# Altium PCB Placa_Final_Embebidos.PcbDoc
Units mm, origin at the board's own origin, x right, y up, seen from the top; angles counter-clockwise.
Board outline 200 x 100 mm, 2 copper layers (Top Layer, Bottom Layer); 77 components, 78 nets, 447 pads, 0 vias.
Unrouted connection lines stored in the file: 1.
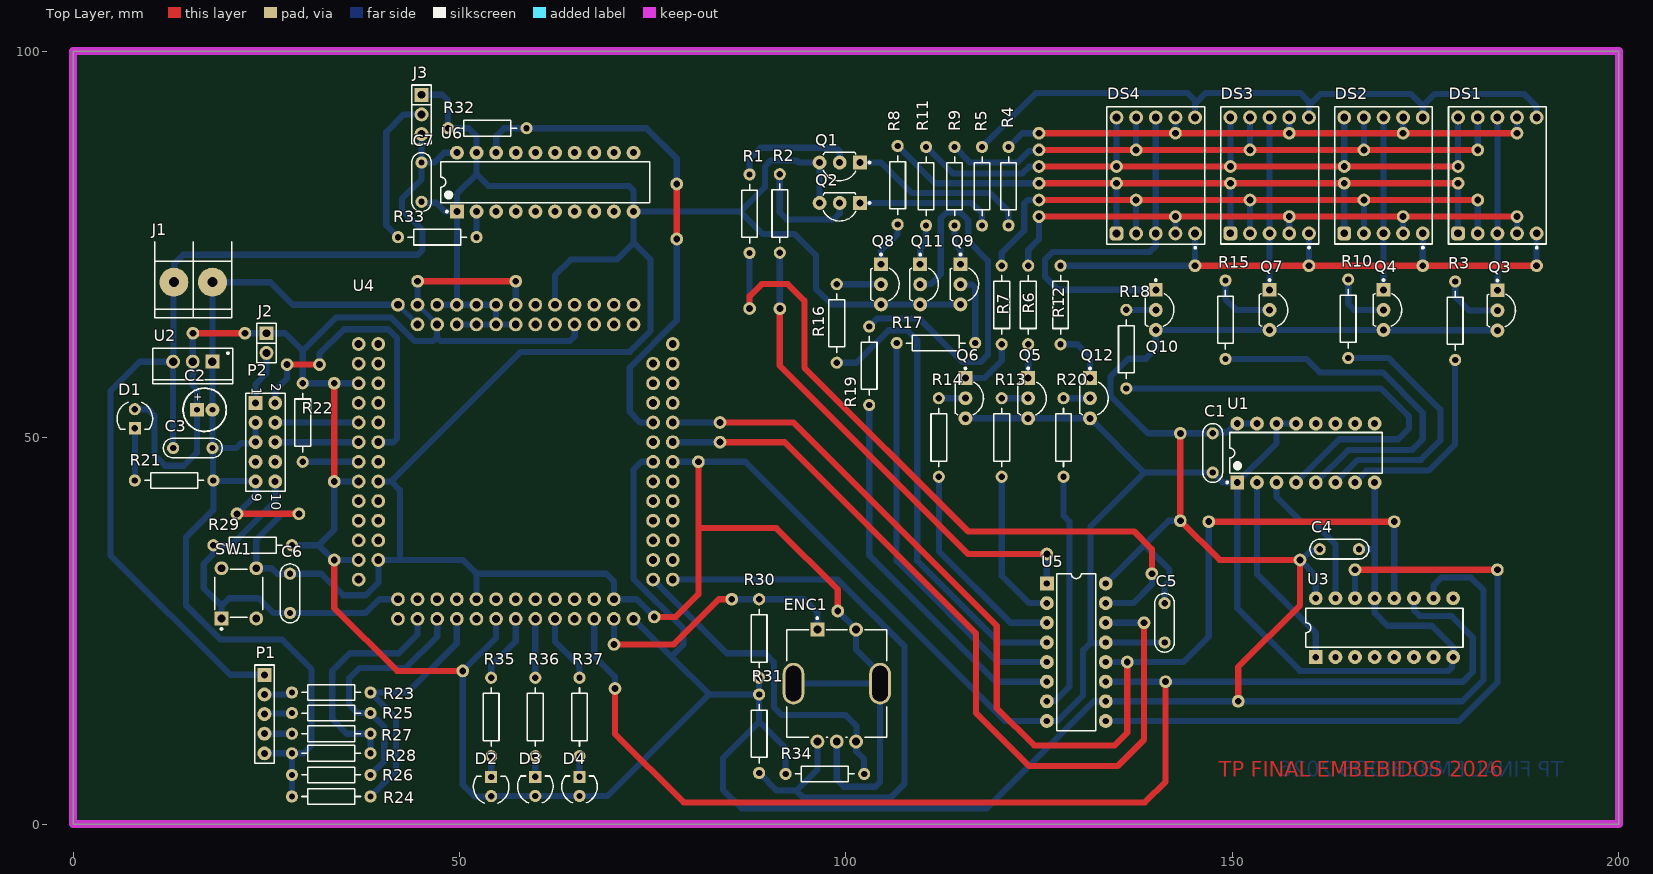
[diagram p0: Top Layer view]
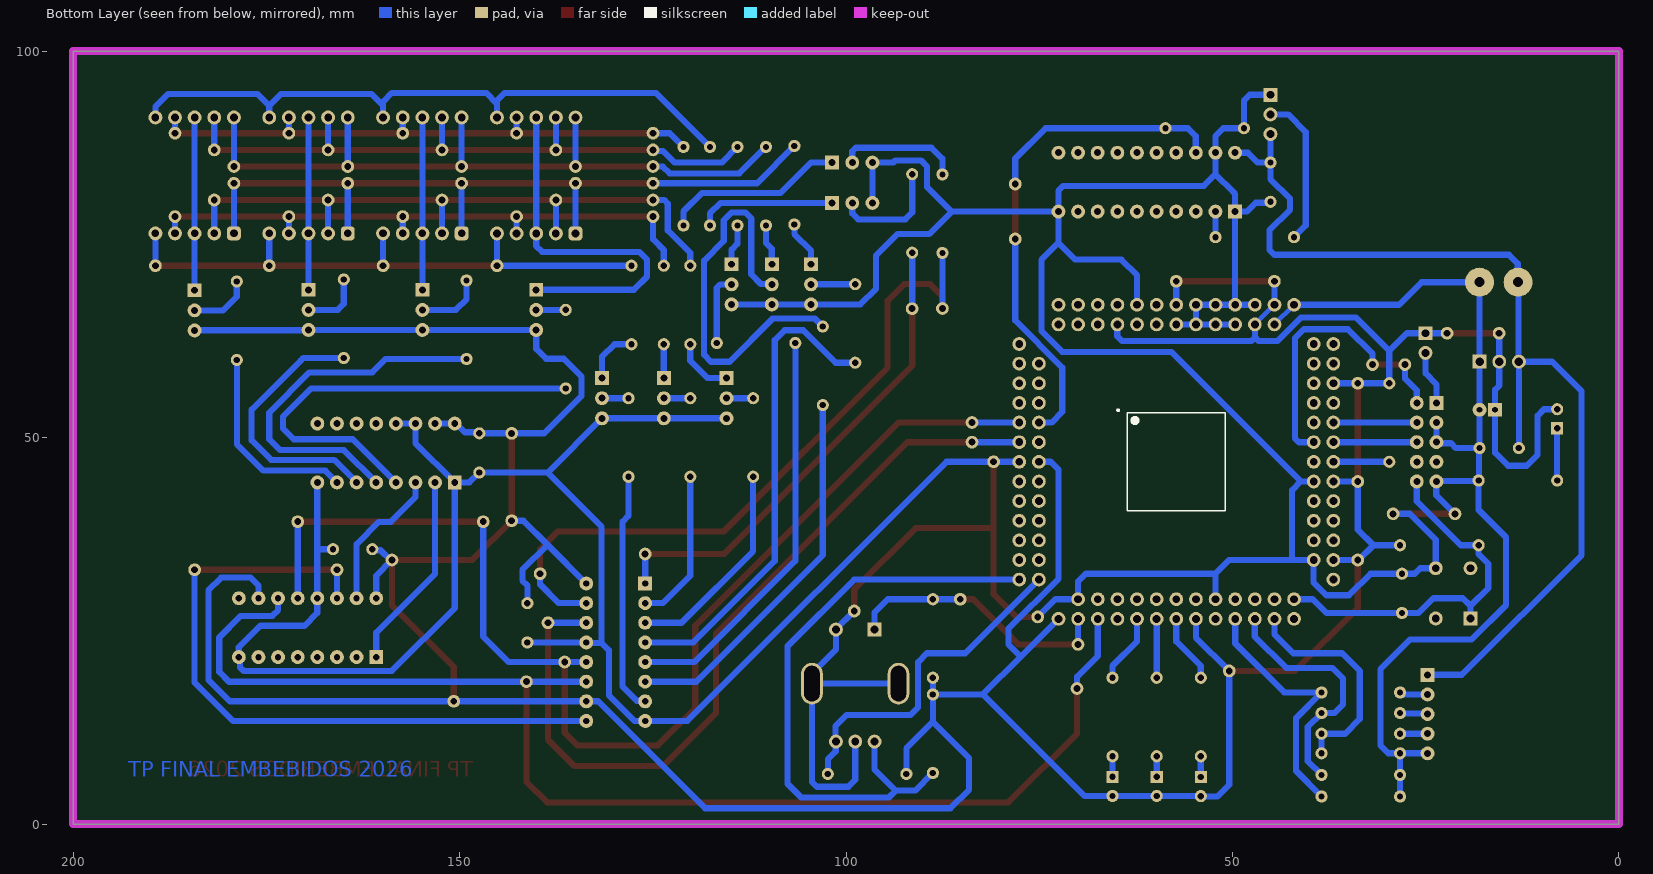
[diagram p1: Bottom Layer view, seen from below]
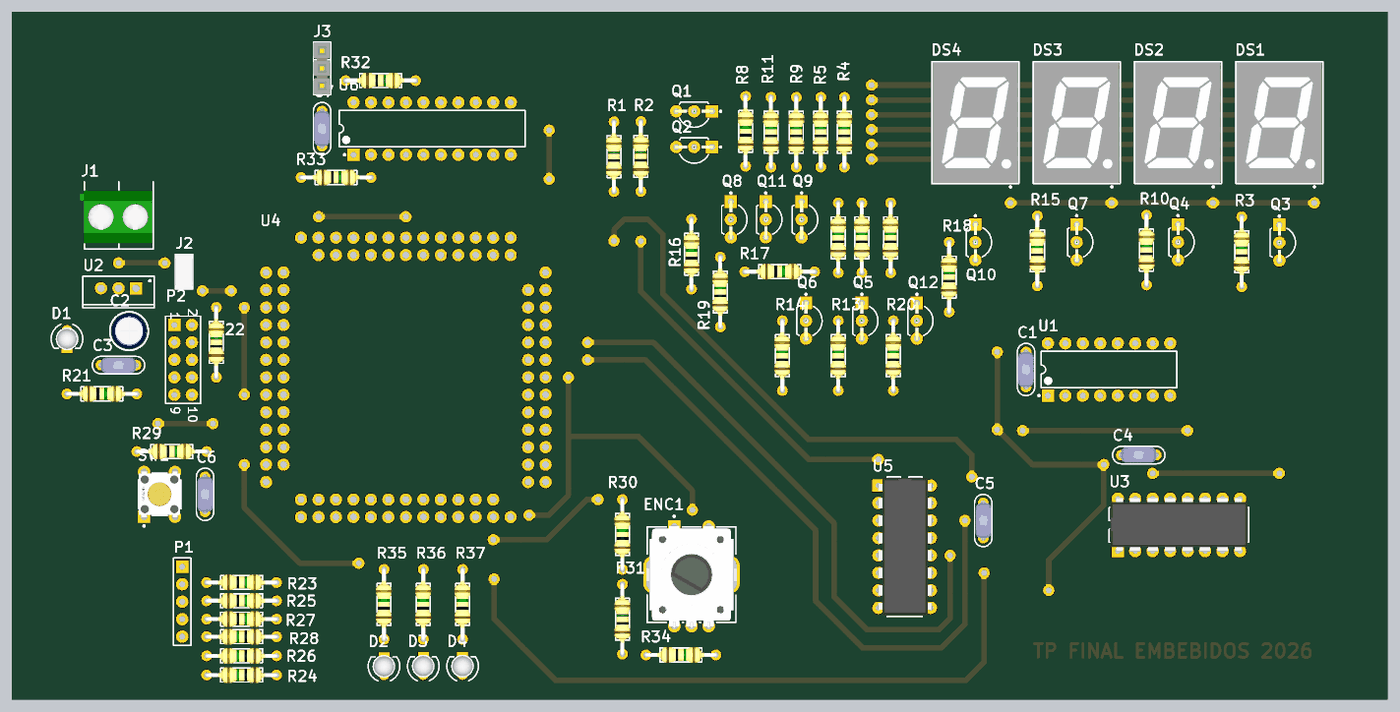
[diagram p2: 3D render of the assembled board from above, using the file's embedded part models]

## Layer stack, top to bottom
Top Solder: solder mask 0.0102, Solder Resist, Dk 3.5
Top Layer: signal copper 0.0356
Dielectric 1: dielectric 0.32, FR-4, Dk 4.8
Bottom Layer: signal copper 0.0356
Bottom Solder: solder mask 0.0102, Solder Resist, Dk 3.5

## Board outline
0,0 0,100 200,100 200,0

## Design rules (kind name [scope] priority, off if disabled: settings)
Clearance [All] p1: gap=0.2 ignorepadtopadclearanceinfootprint=FALSE
PolygonConnect [All] p1: connectstyle=Relief reliefconductorwidth=0.254 reliefentries=4 polygonreliefangle="90 Angle" airgapwidth=0.254
RoutingVias [All] p1: holewidth=0.711 width=1.27 viastyle="Through Hole" minholewidth=0.711 minwidth=1.27 maxholewidth=0.711 maxwidth=1.27
SolderMaskExpansion [All] p1: expansion=0.102 istentingtop=FALSE
SupplyNets "Schematic Supply Nets_2" [InNet('5V')] p1: voltage=0.000
SupplyNets "Schematic Supply Nets_1" [InNet('3V3')] p2: voltage=0.000
SupplyNets "Schematic Supply Nets" [InNet('GND')] p3: voltage=0.000
Width [All] p1: maxlimit=1 minlimit=0.6 preferedwidth=0.8
30 further rules are at their usual default settings.

## Classes and differential pairs
component class Placa_Final_Embebidos_MCU: C2 C3 C5 C6 C7 D4 ENC1 J1 J2 P2 R22 R25 R26 R28 R29 R31 R32 R33 R35 SW1 U2 U3 U4 U6
component class Placa_Final_Embebidos_Displays: C1 DS2 DS4 Q1 Q2 Q3 Q4 Q5 Q6 Q7 Q8 Q9 Q10 Q11 Q12 R1 R2 R3 R4 R5 R6 R7 R8 R9 R10 R12 R13 R14 R15 R16 R17 R18 R19 R20 U4

## Components (designator, comment, footprint, x,y, rotation, side; value= is the part's Value field where it differs from the comment)
C1 "100nF" CAP200 147.447,48.006 r270 top
C2 "10uF" CAP100RP 17.021,53.594 r0 top
C3 "100nF" CAP200 15.481,48.641 r0 top
C4 "100nF" CAP200 163.83,35.56 r180 top
C5 "100nF" CAP200 141.224,26.035 r90 top
C6 "100nF" CAP200 28.067,29.845 r90 top
C7 "100nF" CAP200 45.085,83.045 r270 top
D1 "" LED3 7.988,52.451 r270 top
D2 "" LED3 54.089,4.826 r90 top
D3 "" LED3 59.804,4.851 r90 top
D4 "" LED3 65.519,4.851 r90 top
DS1 "" WL-T7DS_L17.5W12.4H7 184.277,83.92 r0 top
DS2 "" WL-T7DS_L17.5W12.4H7 169.545,83.92 r0 top
DS3 "" WL-T7DS_L17.5W12.4H7 154.813,83.92 r0 top
DS4 "" WL-T7DS_L17.5W12.4H7 140.081,83.913 r0 top
ENC1 "PEC12R-3217F-S0024" FP-PEC12R-3217F-S0024-MFG 98.805,18.161 r0 top
J1 "POWER" BORNERA2 15.534,70.104 r90 top
J2 "3V3 REF" JUMPER2 25.019,62.23 r270 top
J3 "MATRIZ" SIP3 45.085,91.808 r270 top
P1 "CARD" HDR1X5 24.752,19.304 r270 top
P2 "JTAG PROG" HDR2X5 23.609,54.483 r270 top
Q1 "BC337" ONSC-TO-92-3-29-11_AM_BL 99.187,85.571 r180 top
Q2 "BC337" ONSC-TO-92-3-29-11_AM_BL 99.187,80.364 r180 top
Q3 "BC327" ONSC-TO-92-3-29-11_AM_BL 184.277,66.461 r270 top
Q4 "BC327" ONSC-TO-92-3-29-11_AM_BL 169.545,66.521 r270 top
Q5 "BC337" ONSC-TO-92-3-29-11_AM_BL 123.571,55.091 r270 top
Q6 "BC337" ONSC-TO-92-3-29-11_AM_BL 115.443,55.091 r270 top
Q7 "BC327" ONSC-TO-92-3-29-11_AM_BL 154.813,66.521 r270 top
Q8 "BC337" ONSC-TO-92-3-29-11_AM_BL 104.521,69.823 r270 top
Q9 "BC337" ONSC-TO-92-3-29-11_AM_BL 114.808,69.823 r270 top
Q10 "BC327" ONSC-TO-92-3-29-11_AM_BL 140.081,66.521 r270 top
Q11 "BC337" ONSC-TO-92-3-29-11_AM_BL 109.601,69.823 r270 top
Q12 "BC337" ONSC-TO-92-3-29-11_AM_BL 131.572,55.091 r270 top
R1 "4.7K" RES400 87.528,73.887 r90 top
R2 "4.7K" RES400 91.44,73.914 r90 top
R3 "4.7K" RES400 178.816,60.044 r90 top
R4 "68" RES400 121.031,77.443 r90 top
R5 "68" RES400 117.602,77.443 r90 top
R6 "68" RES400 123.571,62.076 r90 top
R7 "68" RES400 120.142,62.076 r90 top
R8 "68" RES400 106.68,77.57 r90 top
R9 "68" RES400 114.046,77.443 r90 top
R10 "4.7K" RES400 164.973,60.298 r90 top
R11 "68" RES400 110.363,77.443 r90 top
R12 "68" RES400 127.762,62.076 r90 top
R13 "4.7K" RES400 120.142,44.931 r90 top
R14 "4.7K" RES400 112.014,44.931 r90 top
R15 "4.7K" RES400 149.098,60.171 r90 top
R16 "4.7K" RES400 98.806,59.69 r90 top
R17 "4.7K" RES400 106.553,62.23 r0 top
R18 "4.7K" RES400 136.271,56.361 r90 top
R19 "4.7K" RES400 102.997,54.202 r90 top
R20 "4.7K" RES400 128.143,44.931 r90 top
R21 "330" RES400 7.988,44.45 r0 top
R22 "10k" RES400 29.705,46.863 r90 top
R23 "1.8K" RES400 28.308,17.018 r0 top
R24 "3.3K" RES400 38.468,3.556 r180 top
R25 "1.8K" RES400 28.308,14.351 r0 top
R26 "3.3K" RES400 38.468,6.35 r180 top
R27 "1.8K" RES400 28.308,11.684 r0 top
R28 "3.3K" RES400 38.468,9.144 r180 top
R29 "10k" RES400 18.148,36.068 r0 top
R30 "10k" RES400 88.76,18.923 r90 top
R31 "10k" RES400 88.76,6.604 r90 top
R32 "4.7K" RES400 48.514,90.03 r0 top
R33 "470" RES400 42.037,75.933 r0 top
R34 "10k" RES400 92.189,6.477 r0 top
R35 "330" RES400 54.089,8.763 r90 top
R36 "330" RES400 59.804,8.763 r90 top
R37 "330" RES400 65.519,8.763 r90 top
SW1 "" FP-B3F-1055-MFG 21.45,29.845 r90 top
U1 "SN74HC139N" N0016A 159.512,48.006 r90 top
U2 "LD1117V33" TO220 15.481,59.817 r180 top
U3 "74HC595" DIP16 160.782,21.59 r90 top
U4 "MK64FN1M0VLL12" K64F_DevBoard_Headers_MIRROR 57.264,46.863 r0 top
U5 "74HC595" DIP16 125.984,31.115 r0 top
U6 "CD74HCT245E" N0020A 61.087,83.045 r90 top

## Footprints (in the part's own frame and the unit in brackets; to place one, negate y for a bottom-side part, rotate by r counter-clockwise, add the part's x,y. Pads: shape width x height; smd on the part's side, far side on the other; paste and mask are expansions set on the pad)
BORNERA2 [mm] "Bornera con Tornillos 5mm separación"
  round 3.75 hole 1.3: 1(0,2.5) 2(0,-2.5)
  silkscreen extent -4.6,-5 5.2,5, body extent -3.76,-4.89 3.94,5.61, height 10
CAP100RP [mm] "Body diameter 5mm"
  rect 1.8x1.8 hole 0.762: 1(-1,0)
  round 1.8 hole 0.762: 2(1,0)
  silkscreen extent -2.79,-2.79 2.79,2.79, body extent -2.53,-2.51 2.53,2.54, height 11.53
CAP200 [mil]
  round 62 hole 32: 1(-100,0) 2(100,0)
  silkscreen extent -150,-50 150,50, body extent -110,-46 110,44, height 246
DIP16 [mm]
  rect 1.8x1.8 hole 0.813: 1(0,0)
  round 1.8 hole 0.813: 2(0,-2.54) 3(0,-5.08) 4(0,-7.62) 5(0,-10.16) 6(0,-12.7) 7(0,-15.24) 8(0,-17.78) 9(7.62,-17.78) 10(7.62,-15.24) 11(7.62,-12.7) 12(7.62,-10.16) 13(7.62,-7.62) 14(7.62,-5.08) 15(7.62,-2.54) 16(7.62,0)
  silkscreen extent 1.27,-19.05 6.35,1.27, body extent -0.08,-18.89 7.79,1.11, height 1.98
FP-B3F-1055-MFG [mm]
  rect 1.8x1.8 hole 1 paste-2539.97 mask+0: 1(-3.25,2.25)
  round 1.8 hole 1 paste-2539.97 mask+0: 2(3.25,2.25) 3(-3.25,-2.25) 4(3.25,-2.25)
  silkscreen extent -4.72,-3.1 3.1,3.1, body extent -4.13,-3.2 4.13,3.2, height 0.25
FP-PEC12R-3217F-S0024-MFG [mm]
  rect 1.8x1.8 hole 1 paste-2539.97 mask+0: 1(-2.5,7)
  round 1.8 hole 1 paste-2539.97 mask+0: 2(2.5,7) A(-2.5,-7.5) B(2.5,-7.5) C(0,-7.5)
  rrect100% 2.8x5.4 hole 4.6 slot 2 at 0 deg paste-2539.97 mask+0: 3(-5.6,0) 4(5.6,0)
  silkscreen extent -6.45,-6.95 6.45,8.6, body extent -7,-8.37 7,7.88, height 0.25
HDR1X5 [mm] "Connector; Header; 5 Position"
  rect 1.8x1.8 hole 0.9: 1(0,0)
  round 1.8 hole 0.9: 2(2.54,0) 3(5.08,0) 4(7.62,0) 5(10.16,0)
  silkscreen extent -1.27,-1.27 11.43,1.27
HDR2X5 [mm] "Connector; Header; 5x2 Position"
  rect 1.8x1.8 hole 0.9: 1(0,0)
  round 1.8 hole 0.9: 2(0,2.54) 3(2.54,0) 4(2.54,2.54) 5(5.08,0) 6(5.08,2.54) 7(7.62,0) 8(7.62,2.54) 9(10.16,0) 10(10.16,2.54)
  silkscreen extent -1.27,-1.27 11.43,3.81
JUMPER2 [mm]
  rect 1.8x1.8 hole 1.016: 1(-1.27,0)
  round 1.8 hole 1.016: 2(1.27,0)
  silkscreen extent -2.54,-1.27 2.54,1.27, body extent -2.46,-1.27 2.54,1.27, height 9.5
K64F_DevBoard_Headers_MIRROR [mil] "Shrink QFP, 100-Leads, Body 14x14mm, Pitch 0.5mm, IPC High Density"
  round 70 hole 40: 1(600,800) 2(600,700) 3(500,800) 4(500,700) 5(400,800) 6(400,700) 7(300,800) 8(300,700) 9(200,800) 10(200,700) 11(100,800) 12(100,700) 13(0,800) 14(0,700) 15(-100,800) 16(-100,700) 17(-200,800) 18(-200,700) 19(-300,800) 20(-300,700) 21(-400,800) 22(-400,700) 23(-500,800) 24(-500,700) 25(-600,800) 26(-800,600) 27(-700,600) 28(-800,500) 29(-700,500) 30(-800,400) 31(-700,400) 32(-800,300) 33(-700,300) 34(-800,200) 35(-700,200) 36(-800,100) 37(-700,100) 38(-800,0) 39(-700,0) 40(-800,-100) 41(-700,-100) 42(-800,-200) 43(-700,-200) 44(-800,-300) 45(-700,-300) 46(-800,-400) 47(-700,-400) 48(-800,-500) 49(-700,-500) 50(-800,-600) 51(-600,-800) 52(-600,-700) 53(-500,-800) 54(-500,-700) 55(-400,-800) 56(-400,-700) 57(-300,-800) 58(-300,-700) 59(-200,-800) 60(-200,-700) 61(-100,-800) 62(-100,-700) 63(0,-800) 64(0,-700) 65(100,-800) 66(100,-700) 67(200,-800) 68(200,-700) 69(300,-800) 70(300,-700) 71(400,-800) 72(400,-700) 73(500,-800) 74(500,-700) 75(600,-800) 76(800,-600) 77(700,-600) 78(800,-500) 79(700,-500) 80(800,-400) 81(700,-400) 82(800,-300) 83(700,-300) 84(800,-200) 85(700,-200) 86(800,-100) 87(700,-100) 88(800,0) 89(700,0) 90(800,100) 91(700,100) 92(800,200) 93(700,200) 94(800,300) 95(700,300) 96(800,400) 97(700,400) 98(800,500) 99(700,500) 100(800,600)
LED3 [mil]
  round 62 hole 32: 1(-48,0)
  rect 62x62 hole 32: 2(49,0)
  silkscreen extent -84,-90 54,90, body extent -65,-64 65,65, height 19
N0016A [mm] "DIP, 16-Leads, Body 19.7x6.6mm, Pitch 2.54mm"
  rect 1.8x1.8 hole 0.9: 1(-3.81,8.89)
  round 1.8 hole 0.9: 2(-3.81,6.35) 3(-3.81,3.81) 4(-3.81,1.27) 5(-3.81,-1.27) 6(-3.81,-3.81) 7(-3.81,-6.35) 8(-3.81,-8.89) 9(3.81,-8.89) 10(3.81,-6.35) 11(3.81,-3.81) 12(3.81,-1.27) 13(3.81,1.27) 14(3.81,3.81) 15(3.81,6.35) 16(3.81,8.89)
  silkscreen extent -3.93,-9.85 2.65,10.31, body extent -3.95,-9.85 3.95,9.85, height 5.08
N0020A [mm] "DIP, 20-Leads, Body 26.9x6.6mm, Pitch 2.54mm"
  rect 1.8x1.8 hole 0.9: 1(-3.81,11.43)
  round 1.8 hole 0.9: 2(-3.81,8.89) 3(-3.81,6.35) 4(-3.81,3.81) 5(-3.81,1.27) 6(-3.81,-1.27) 7(-3.81,-3.81) 8(-3.81,-6.35) 9(-3.81,-8.89) 10(-3.81,-11.43) 11(3.81,-11.43) 12(3.81,-8.89) 13(3.81,-6.35) 14(3.81,-3.81) 15(3.81,-1.27) 16(3.81,1.27) 17(3.81,3.81) 18(3.81,6.35) 19(3.81,8.89) 20(3.81,11.43)
  silkscreen extent -3.93,-13.5 2.65,13.5, body extent -3.95,-13.45 3.95,13.45, height 5.08
ONSC-TO-92-3-29-11_AM_BL [mm] "TO, 3-Leads, Body Dia 4.7mm, Pitch 2.6mm"
  rect 1.8x1.8 hole 0.9: 1(-2.6,0)
  round 1.8 hole 0.9: 2(0,0) 3(2.6,0)
  silkscreen extent -3.98,-1.34 2.13,2.35, body extent -2.84,-1.34 2.84,2.35, height 5.33
RES400 [mil]
  round 62 hole 32: 1(0,0) 2(400,0)
  silkscreen extent 50,-40 350,40, body extent -12,-45 412,46, height 96
SIP3 [mm]
  rect 1.8x1.8 hole 1.016: 1(-2.54,0)
  round 1.8 hole 1.016: 2(0,0) 3(2.54,0)
  silkscreen extent -3.81,-1.27 3.81,1.27, body extent -3.81,-1.3 3.81,1.24, height 8.38
TO220 [mm] "TO, Thru-Hole, Vertical, Heatsink Mounted; 3 In-Line Leads; Pitch 2.54 mm"
  rect 1.8x1.8 hole 1.1: 1(-2.54,0)
  round 1.8 hole 1.1: 2(0,0) 3(2.54,0)
  silkscreen extent -5.2,-1.75 5.2,2.85, body extent -5.25,-1.8 5.25,2.9, height 19.7
WL-T7DS_L17.5W12.4H7 [mm] "7 Segments Display THT Single Digit , body 12.4x17.5mm"
  rrect50% 1.8x1.8 hole 1: 1(-5.08,-7.5)
  round 1.8 hole 1: 2(-2.54,-7.5) 3(0,-7.5) 4(2.54,-7.5) 5(5.08,-7.5) 6(5.08,7.5) 7(2.54,7.5) 8(0,7.5) 9(-2.54,7.5) 10(-5.08,7.5)
  silkscreen extent -6.32,-9.47 6.32,8.87, body extent -6.2,-8.75 6.2,8.75, height 7.1

## Part data
C1 C3 C4 C5 C6 C7: library part CAP
C2: library part CAPPOL
D1 D2 D3 D4: library part LED
DS1 DS2 DS3 DS4: library part CMP-03913-119893999-3, "7-Seg Display, Comm Anode, Super Red Rohs Compliant: Yes", Forward Current=100mA, Forward Voltage=2V, Max Operating Temperature=85°C, Max Reverse Voltage (DC)=5V, Min Operating Temperature=-40°C, Dominant Wavelength=635nm, Height=7mm, Length=17.5mm, Luminous Intensity=20mcd, RoHS=Compliant, Width=12.4mm
ENC1: library part CMP-07421-000063-1, "ROTARY ENCODER", Height=13.4mm, Length=23mm, RoHS Compliant=Yes, Width=12.5mm
J1: library part "BORNERA 2"
J2: library part JUMPER
J3: library part CON3
P1: library part "Header 5", "Header, 5-Pin", LatestRevisionDate=17-Jul-2002, LatestRevisionNote="Re-released for DXP Platform.", Publisher="Altium Limited"
P2: library part "Header 5X2", "Header, 5-Pin, Dual row", LatestRevisionDate=17-Jul-2002, LatestRevisionNote="Re-released for DXP Platform.", Publisher="Altium Limited"
Q1 Q2 Q5 Q6 Q8 Q9 Q11 Q12: library part CMP-1048-01583-1, "Amplifier Transistor, NPN Silicon, 3-Pin TO-92, Pb-Free, Ammo Box", Manufacturer="On Semiconductor", PartNumber=BC337-40ZL1G, ComponentLink1Description="Manufacturer URL", ComponentLink1URL=http://www.onsemi.com/, ComponentLink2Description=Datasheet, ComponentLink2URL=http://www.onsemi.com/pub_link/Collateral/BC337-D.PDF, ComponentLink3Description="Package Specification", ComponentLink3URL=http://www.onsemi.com/pub_link/Collateral/MAC97-D.PDF, DatasheetVersion="Rev. 8", IC Continuous (A)=0.8, Mounting Technology="Through Hole", PackageDescription="3-Pin Transistor Outline, Body 4.825 x 3.685 mm, Pitch 1.27 mm", PackageReference=TO-92-3-29-11_AM_BL, PackageVersion="Rev. AM", Packing="Ammo Box", Polarity=NPN, RoHS=TRUE
Q3 Q4 Q7 Q10: library part CMP-1048-01577-1, "Amplifier Transistor, PNP Silicon, 3-Pin TO-92, Pb-Free, Ammo Box", Manufacturer="On Semiconductor", PartNumber=BC327-25ZL1G, ComponentLink1Description="Manufacturer URL", ComponentLink1URL=http://www.onsemi.com/, ComponentLink2Description=Datasheet, ComponentLink2URL=http://www.onsemi.com/pub_link/Collateral/BC327-D.PDF, ComponentLink3Description="Package Specification", ComponentLink3URL=http://www.onsemi.com/pub_link/Collateral/MAC97-D.PDF, DatasheetVersion="Rev. 6", IC Continuous (A)=-0.8, Mounting Technology="Through Hole", PackageDescription="3-Pin Transistor Outline, Body 4.825 x 3.685 mm, Pitch 1.27 mm", PackageReference=TO-92-3-29-11_AM_BL, PackageVersion="Rev. AM", Packing="Ammo Box", Polarity=PNP, RoHS=TRUE
R1 R2 R3 R4 R5 R6 R7 R8 R9 R10 R11 R12 R13 R14 R15 R16 R17 R18 R19 R20 R21 R22 R23 R24 R25 R26 R27 R28 R29 R30 R31 R32 R33 R34 R35 R36 R37: library part RES
SW1: library part CMP-08834-000061-1, "SWITCH TACTILE SPST-NO 0.05A 24V", Actuator Color=Orange, Contact Current Rating=50mA, Contact Resistance=100mR, Max Operating Temperature=70°C, Max Voltage Rating (DC)=24V, Min Operating Temperature=-25°C, Operating Force=2.55N, Package Quantity=1500, Actuator Length=3mm, Contact Material=Gold, Contact Plating=Silver, Contact Type="1 maker", Current Rating=50mA, Depth=6mm, Electrical Life=300000Cycles, Height=7.3mm, Illumination Type=Non-Illuminated, Lead Free="Lead Free", Length=6mm, Max Current Rating=50mA, Mechanical Life=100000Cycles, Mount="Through Hole", Number of Poles=1, Orientation=Straight, Packaging=Bag, RoHS Compliant=Yes, Series=B3F, Switch Function=Off-Mom, Switch Travel=0.25mm, Termination="PC Pins", Throw Configuration=SPST, Voltage Rating (DC)=24V, Weight=0.25g, Width=6mm
U1: library part CMP-1633-00660-2, "Dual 2-Line To 4-Line Decoders/Demultiplexers, N0016A, TUBE", F @ Nom Voltage(Max)(Mhz)=28, Generic Part Number=SN74HC139, ICC @ Nom Voltage(Max)(mA)=0.08, Manufacturer="Texas Instruments", Operating Temperature Range(C)="-40 to 85", Rating=Catalog, tpd @ Nom Voltage(Max)(ns)=44, Voltage(Nom)(V)=3.3,5, Bits(#)=4, Channels(#)=2, Code_JEDEC=MS-001, Configuration=2：4, DatasheetVersion=SCLS108D, Function=Decoder/Demultiplexer, Input Type=LVTTL/CMOS, Output Drive (IOL/IOH)(Max)(mA)=5.2/-5.2, Output Type=CMOS, PackageReference=N0016A, Schmitt Trigger=No, Technology Family=HC, Type=Standard, VCC(Max)(V)=6, VCC(Min)(V)=2
U2: library part CMP-0244-00470-1, "Fixed Low Drop Positive Voltage Regulator, 3.3V, 3-Pin TO-220", ComponentLink1Description="Manufacturer URL", ComponentLink1URL=http://www.st.com, ComponentLink2Description=Datasheet, ComponentLink2URL=http://www.st.com/internet/com/TECHNICAL_RESOURCES/TECHNICAL_LITERATURE/DATASHEET/CD00000544.pdf, ComponentLink3Description="Package Specification", ComponentLink3URL=http://www.st.com/internet/com/TECHNICAL_RESOURCES/TECHNICAL_LITERATURE/PACKAGE_INFORMATION/CD00004649.pdf, DatasheetVersion=1/11/2011, PackageDescription="TO, Thru-Hole, Vertical, Heatsink Mounted; 3 In-Line Leads; Pitch 2.54 mm", PackageReference=TO220, PackageVersion=ver3.0
U4: library part CMP-0182-00049-1, "Cortex-M4-based Microcontroller with FPU, 1 MB, 120 MHz, 1.71 to 3.6 V, -40 to 105 degC, 100-Pin QFP (983-02), RoHS, Tray", Manufacturer="Freescale Semiconductor", Temperature Range="-40 to 105 degC", ComponentLink1Description="Manufacturer URL", ComponentLink1URL=http://www.freescale.com/, ComponentLink2Description=Datasheet, ComponentLink2URL=http://cache.freescale.com/files/microcontrollers/doc/data_sheet/K64P144M120SF5.pdf?pspll=1, ComponentLink3Description="Package Specification", ComponentLink3URL=http://cache.freescale.com/files/shared/doc/package_info/98ASS23308W.pdf, DatasheetVersion="Rev. 3", Flash="1 MB", Mounting Technology="Surface Mount", PackageDescription="100-Pin Plastic Quad Flat Package, Body 14 x 14 mm, Pitch 0.5 mm", PackageVersion="Rev. J", Packing=Tray, PartNumber=MK64FN1M0VLL12, RoHS=TRUE, SRAM="256 KB", VBAT="1.71 to 3.6 V", VDD="1.71 to 3.6 V", VDDA="1.71 to 3.6 V"
U6: library part CMP-1620-00444-2, "High Speed CMOS Logic Non-Inverting Octal-Bus Transceiver with 3-State Outpus, N0020A, TUBE", F @ Nom Voltage(Max)(Mhz)=25, Generic Part Number=CD74HCT245, ICC @ Nom Voltage(Max)(mA)=0.08, Manufacturer="Texas Instruments", Operating Temperature Range(C)="-55 to 125", Rating=Catalog, tpd @ Nom Voltage(Max)(ns)=33, Voltage(Nom)(V)=5, Bits(#)=8, Code_JEDEC=MS-001, DatasheetVersion=SCHS119A, Input Type=TTL, Output Drive (IOL/IOH)(Max)(mA)=-4/4, Output Type=CMOS, PackageReference=N0020A, Schmitt Trigger=No, Technology Family=HCT, VCC(Max)(V)=5.5, VCC(Min)(V)=4.5

## Free pads (board coordinates)
  round 1.651 hole 0.889: 2(15.494,63.5) 2(21.209,40.132) 2(22.225,63.5) 2(27.686,59.436) 2(29.21,40.132) 2(31.877,59.436) 2(33.782,34.163) 2(33.782,44.323) 2(33.782,57.023) 2(44.577,70.231) 2(50.419,19.812) 2(57.277,70.231) 2(69.977,23.241) 2(70.104,17.526) 2(75.184,26.797) 2(78.105,75.692) 2(78.105,82.804) 2(80.899,46.863) 2(83.693,49.403) 2(83.693,51.943) 2(85.217,29.083) 2(87.528,66.7) 2(91.44,66.675) 2(98.933,27.559) 2(124.968,78.586) 2(124.968,80.745) 2(124.968,82.904) 2(124.968,85.063) 2(124.968,87.222) 2(124.968,89.381) 2(125.984,34.925) 2(135.001,82.904) 2(135.001,85.063) 2(136.398,20.955) 2(137.541,80.745) 2(137.541,87.222) 2(138.557,26.035) 2(139.573,32.385) 2(141.351,18.415) 2(142.621,78.586) 2(142.621,89.381) 2(143.256,39.243) 2(143.256,50.546) 2(145.161,72.236) 2(146.939,39.116) 2(149.733,82.904) 2(149.733,85.063) 2(150.749,15.875) 2(152.273,80.745) 2(152.273,87.222) 2(157.353,78.586) 2(157.353,89.381) 2(158.75,34.163) 2(159.893,72.236) 2(164.465,82.904) 2(164.465,85.063) 2(165.862,32.893) 2(167.005,80.745) 2(167.005,87.222) 2(170.942,39.116) 2(172.085,78.586) 2(172.085,89.381) 2(174.625,72.236) 2(179.197,82.904) 2(179.197,85.063) 2(181.737,80.745) 2(181.737,87.222) 2(184.277,32.893) 2(186.817,78.586) 2(186.817,89.381) 2(189.357,72.236)

## Nets (pads, with @x,y where several pads share a name; then routed paths per layer and width w, separated by ;. In a path a pad name is that pad's centre, name@x,y a point inside that pad or via, vN(x,y) a via of type N, cw(c..) or ccw(c..) an arc to the next point about the centre after c; other vN are vias at no path point)
3V3: C1.1 C2.1 C4.2 C5.2 D1.1 D2.1 D3.1 D4.1 J2.1 pad.2@15.494,63.5 pad.2@22.225,63.5 pad.2@33.782,34.163 pad.2@33.782,44.323 pad.2@33.782,57.023 pad.2@44.577,70.231 pad.2@50.419,19.812 pad.2@57.277,70.231 pad.2@143.256,39.243 pad.2@143.256,50.546 pad.2@150.749,15.875 pad.2@158.75,34.163 Q3.3 Q4.3 Q7.3 Q10.3 R22.2 R29.2 R30.1 R31.2 R34.1 U1.15 U1.16 U2.2 U3.10 U3.16 U4.8 U4.13 U4.22 U4.23 U4.30 U4.40 U4.48 U4.61 U4.75 U4.89 U5.10 U5.16 | length 605.4
  Top Layer w0.8: pad.2@15.494,63.5 pad.2@22.225,63.5 ; pad.2@33.782,34.163 33.782,27.94 41.91,19.812 pad.2@50.419,19.812 ; pad.2@33.782,44.323 pad.2@33.782,57.023 ; pad.2@44.577,70.231 pad.2@57.277,70.231 ; pad.2@143.256,50.546 143.256,39.243 148.336,34.163 158.75,34.163 158.75,28.321 150.749,20.32 pad.2@150.749,15.875
  Bottom Layer w0.6: U4.23 U4.22
  Bottom Layer w0.8: D1.1 9.69,53.67 10.528,52.832 10.528,47.752 11.925,46.355 14.338,46.355 16.021,48.038 C2.1 16.021,56.183 15.481,56.723 U2.2 ; U2.2@15.488,59.823 15.488,63.494 pad.2@15.494,63.5 ; pad.2@22.225,63.5 J2.1 27.432,63.5 29.705,61.227 ; R29.2 31.75,36.068 ; U4.48 33.655,34.163 31.75,36.068 ; U4.40 33.782,44.323 33.782,38.1 31.75,36.068 ; U4.30 33.782,57.023 R22.2 29.705,61.227 ; U4.23 44.571,67.189 44.571,70.225 pad.2@44.577,70.231 ; U4.22 47.078,64.617 47.078,62.953 ; U4.61 54.724,24.117 50.419,19.812 50.419,5.08 51.943,3.556 54.038,3.556 D2.1 54.102,3.619 59.791,3.619 D3.1 D4.1 69.151,3.632 82.283,16.764 ; U4.13 57.271,67.189 57.271,70.225 pad.2@57.277,70.231 ; U4.8 64.897,64.63 64.897,63.119 64.262,62.484 47.546,62.484 47.078,62.953 ; U4.75 77.394,21.653 ; U4.89 73.533,46.863 72.504,45.834 72.504,31.763 78.994,25.273 78.994,23.254 77.394,21.653 ; R30.1 R31.2 ; R34.1 92.189,9.779 88.76,13.208 ; U5.16 138.557,36.068 ; C5.2 141.224,30.861 141.859,31.496 141.859,32.893 138.684,36.068 138.557,36.068 ; pad.2@143.256,39.243 141.732,39.243 138.557,36.068 ; U1.15 U1.16 150.433,51.816 149.311,50.694 147.595,50.694 C1.1 143.256,50.546 139.065,50.546 134.239,55.372 134.239,57.912 136.525,60.198 138.811,60.198 140.081,61.468 Q10.3 Q7.3 Q4.3 169.575,63.891 Q3.3@184.277,63.891 ; U3.16 160.782,32.131 158.75,34.163 158.98,34.163 160.229,35.412 161.142,35.412 C4.2 ; U3.10 176.022,30.861 177.038,31.877 180.848,31.877 182.499,30.226 182.499,18.669 179.705,15.875 150.749,15.875 U5.10 132.08,15.875 118.237,2.032 86.487,2.032 84.074,4.445 84.074,8.522 88.76,13.208 ; 29.705,61.227 34.01,65.532 41.148,65.532 44.196,62.484 46.609,62.484 47.078,62.953 ; 77.394,21.653 82.283,16.764 ; 82.283,16.764 R31.2 ; 88.76,13.208 R31.2
5V: C3.1 C7.1 J1.1 J3.3 P1.1 U2.3 U6.20 | length 136.3
  Bottom Layer w0.8: C3.1 U2.3 ; P1.1 20.32,19.304 4.826,34.798 4.826,56.007 8.636,59.817 U2.3 ; J3.3 C7.1 ; U6.20 48.006,86.855 46.736,85.585 C7.1 ; U2.3 12.988,59.863 12.988,70.058 J1.1 13.081,70.151 13.081,72.517 14.224,73.66 44.577,73.66 45.212,74.295 45.212,76.835 42.545,79.502 42.545,80.899 45.085,83.439 C7.1
A: pad.2@87.528,66.7 pad.2@139.573,32.385 R1.1 U5.15 | length 92.3
  Top Layer w0.8: pad.2@87.528,66.7 87.528,68.301 89.078,69.85 92.456,69.85 94.615,67.691 94.615,59.055 115.824,37.846 137.287,37.846 139.573,35.56 pad.2@139.573,32.385
  Bottom Layer w0.8: pad.2@87.528,66.7 R1.1 ; U5.15 137.16,28.575 139.573,30.988 pad.2@139.573,32.385
Ac: Q1.1 R4.1 | length 23.7
  Bottom Layer w0.8: Q1.1 101.814,85.598 104.521,85.598 108.458,81.661 118.618,81.661 121.031,79.248 R4.1
B: pad.2@91.44,66.675 pad.2@125.984,34.925 R2.1 U5.1 | length 63.1
  Top Layer w0.8: pad.2@91.44,66.675 91.44,59.309 115.824,34.925 pad.2@125.984,34.925
  Bottom Layer w0.8: pad.2@91.44,66.675 R2.1 ; U5.1 pad.2@125.984,34.925
Bc: Q2.1 R5.1 | length 17.9
  Bottom Layer w0.8: Q2.1 116.232,80.364 117.602,78.994 R5.1
BOTON: ENC1.1 pad.2@69.977,23.241 pad.2@85.217,29.083 R30.2 U4.73 | length 35
  Top Layer w0.8: pad.2@69.977,23.241 77.724,23.241 83.566,29.083 pad.2@85.217,29.083
  Bottom Layer w0.8: U4.73 69.971,26.537 69.971,23.247 pad.2@69.977,23.241 ; pad.2@85.217,29.083 R30.2 94.602,29.083 96.305,27.38 ENC1.1
C: R13.1 U5.2 | length 20.1
  Bottom Layer w0.8: R13.1 120.142,32.131 123.698,28.575 U5.2
Cc: Q5.1 R6.1 | length 4.4
  Bottom Layer w0.8: Q5.1 R6.1
CLOCK_TM: R25.2 R26.1 U4.55 | length 32
  Bottom Layer w0.8: R26.1 40.246,8.128 40.246,12.573 R25.2 36.83,14.351 35.687,15.494 35.687,18.796 37.084,20.193 43.053,20.193 47.104,24.244 U4.55
CLOCK_TM_IN: P1.3 R25.1 | length 3.6
  Bottom Layer w0.8: P1.3 24.816,14.287 28.245,14.287 R25.1
D: R14.1 U5.3 | length 27.4
  Bottom Layer w0.8: R14.1 112.014,35.306 121.285,26.035 U5.3
DATA_TM: R23.2 R24.1 U4.57 | length 33.2
  Bottom Layer w0.8: R24.1 41.77,6.858 41.77,13.716 R23.2 43.307,17.018 49.644,23.355 U4.57
DATA_TM_IN: P1.2 R23.1 | length 3.7
  Bottom Layer w0.8: P1.2 27.844,16.764 28.098,17.018 R23.1
Dc: Q6.1 R7.1 | length 7.8
  Bottom Layer w0.8: Q6.1 117.889,57.691 120.142,59.944 R7.1
DIG0: R18.1 U1.4 | length 57.1
  Bottom Layer w0.8: R18.1 169.191,56.361 172.847,52.705 172.847,51.181 171.45,49.784 163.83,49.784 U1.4
DIG1: R15.1 U1.5 | length 48
  Bottom Layer w0.8: R15.1 159.539,60.171 161.29,58.42 169.418,58.42 174.625,53.213 174.625,49.784 173.228,48.387 164.973,48.387 U1.5
DIG2: R10.1 U1.6 | length 34.5
  Bottom Layer w0.8: U1.6 166.243,47.117 174.371,47.117 176.911,49.657 176.911,53.594 170.561,59.944 170.207,60.298 R10.1
DIG3: R3.1 U1.7 | length 25.9
  Bottom Layer w0.8: U1.7 167.386,45.72 175.387,45.72 178.816,49.149 R3.1
DP: R20.1 U5.7 | length 31.2
  Bottom Layer w0.8: U5.7 126.063,15.954 127.079,15.954 128.905,17.78 128.905,39.116 128.143,39.878 R20.1
DPc: Q12.1 R12.1 | length 7.2
  Bottom Layer w0.8: R12.1 129.948,62.076 131.572,60.452 Q12.1
E: R16.1 U5.4 | length 62.4
  Bottom Layer w0.8: R16.1 101.346,59.69 105.537,63.881 107.95,63.881 109.22,62.611 109.22,34.036 119.761,23.495 U5.4
Ec: Q8.1 R8.1 | length 6
  Bottom Layer w0.8: Q8.1 104.521,74.168 106.68,76.327 R8.1
ENABLE_TM: R27.2 R28.1 U4.53 | length 29.5
  Bottom Layer w0.8: R28.1 R27.2 35.433,11.684 33.528,13.589 33.528,19.812 35.814,22.098 42.138,22.098 44.564,24.524 U4.53
ENABLE_TM_IN: P1.4 R27.1 | length 3.6
  Bottom Layer w0.8: P1.4 R27.1
ENC_A: ENC1.A R31.1 U4.76 | length 79.7
  Bottom Layer w0.8: U4.76 98.933,31.623 107.569,22.987 107.569,5.207 105.791,3.429 94.475,3.429 93.586,4.318 ; R31.1 91.046,4.318 93.586,4.318 ; ENC1.A 96.305,7.037 93.586,4.318
ENC_B: ENC1.B R34.2 U4.77 | length 44.2
  Bottom Layer w0.8: U4.77 84.569,22.098 89.535,22.098 90.678,20.955 90.678,15.113 91.694,14.097 99.949,14.097 101.346,12.7 101.346,10.702 ENC1.B 101.333,10.633 101.333,9.398 102.349,8.382 R34.2
F: R17.1 U5.5 | length 53
  Bottom Layer w0.8: R17.1 106.553,34.036 119.634,20.955 U5.5
Fc: Q9.1 R9.1 | length 5.3
  Bottom Layer w0.8: R9.1 114.046,75.057 114.808,74.295 Q9.1
G: R19.1 U5.6 | length 49.2
  Bottom Layer w0.8: R19.1 102.997,34.798 119.38,18.415 U5.6
Gc: Q11.1 R11.1 | length 5.3
  Bottom Layer w0.8: Q11.1 109.601,74.422 110.363,75.184 R11.1
GND: C1.2 C2.2 C3.2 C4.1 C5.1 C6.2 C7.2 ENC1.2 ENC1.3 ENC1.4 ENC1.C J1.2 J3.1 P1.5 P2.3 P2.5 P2.9 pad.2@21.209,40.132 pad.2@29.21,40.132 pad.2@75.184,26.797 pad.2@80.899,46.863 pad.2@98.933,27.559 Q1.3 Q2.3 Q5.3 Q6.3 Q8.3 Q9.3 Q11.3 Q12.3 R21.2 R24.2 R26.2 R28.2 R32.1 SW1.4 U1.1 U1.8 U1.13 U1.14 U2.1 U3.8 U3.13 U4.9 U4.14 U4.15 U4.16 U4.17 U4.18 U4.19 U4.20 U4.21 U4.24 U4.25 U4.41 U4.49 U4.60 U4.74 U4.88 U5.8 U5.13 U6.1 U6.10 U6.19 | length 789.5
  Top Layer w0.8: pad.2@21.209,40.132 pad.2@29.21,40.132 ; pad.2@75.184,26.797 77.978,26.797 80.899,29.718 80.899,38.291 ; pad.2@80.899,46.863 80.899,38.291 ; pad.2@98.933,27.559 98.933,30.353 90.995,38.291 80.899,38.291
  Bottom Layer w0.6: U4.25 U4.24
  Bottom Layer w0.8: pad.2@21.209,40.132 23.622,42.545 23.622,44.31 P2.9 ; P2.9@23.546,44.386 18.212,44.386 R21.2 ; P2.3 P2.5 23.475,49.269 21.71,49.269 21.082,48.641 C3.2 ; P1.5 R28.2 ; R24.2 R26.2 R28.2 ; pad.2@29.21,40.132 27.051,40.132 23.7,36.781 SW1.4 25.706,33.095 26.416,32.385 C6.2 32.131,32.385 34.925,29.591 37.846,29.591 39.497,31.242 39.497,34.15 U4.49 42.291,34.163 ; U4.41 41.148,44.323 ; U4.25 28.448,67.183 25.527,70.104 J1.2 18.028,70.098 18.028,59.823 U2.1 C2.2 C3.2 ; C7.2 45.212,80.378 46.99,80.378 48.133,79.235 U6.1 ; J3.1 47.752,94.348 48.514,93.586 R32.1 51.181,90.03 52.197,89.014 U6.19 52.197,84.061 ; U4.21 U4.19 ; U4.20 U4.18 U4.16 ; U4.60 52.197,29.096 52.197,32.385 ; U4.14 U4.16 ; U4.9 62.344,70.98 64.389,73.025 70.358,73.025 72.517,75.184 ; pad.2@75.184,26.797 72.898,29.083 U4.74 69.964,31.382 68.961,32.385 52.197,32.385 ; U4.88 80.899,46.863 86.995,46.863 120.523,13.335 U5.8 127.381,13.335 130.683,16.637 130.683,22.479 131.642,23.438 ; ENC1.3 ENC1.4 ; Q2.3 Q1.3 93.88,85.571 93.599,85.852 90.297,85.852 89.535,85.09 89.535,82.423 86.347,79.235 ; ENC1.C 98.805,5.716 99.695,4.826 103.759,4.826 104.405,5.472 ENC1.4 ; pad.2@98.933,27.559 101.305,25.187 ENC1.2 101.305,22.561 104.508,19.358 104.508,18.669 104.405,18.566 ENC1.4 ; Q9.3 Q11.3 Q8.3 98.131,67.223 96.139,69.215 96.139,73.533 93.345,76.327 89.255,76.327 86.347,79.235 ; Q6.3 Q5.3 Q12.3 138.597,45.466 ; C5.1 U5.13 133.547,23.438 131.642,23.438 ; U1.13 U1.14 155.702,49.276 U1.1 ; C4.1 168.402,35.56 ; U1.8 168.402,35.56 ; C3.2 18.085,48.578 18.085,44.514 R21.2 ; R21.2 18.148,40.627 14.605,37.084 14.605,28.321 19.05,23.876 26.985,23.876 30.861,20 30.861,10.16 29.845,9.144 R28.2 ; 41.148,44.323 57.912,61.087 72.009,61.087 74.726,63.804 74.726,72.975 72.517,75.184 ; 41.148,44.323 42.291,43.18 42.291,34.163 ; 42.291,34.163 50.419,34.163 52.197,32.385 ; U4.19 U4.17 U4.15 U4.16 ; U4.19 49.651,67.189 49.651,79.229 U6.1 ; U6.1 49.657,81.521 49.911,81.775 52.197,84.061 ; 52.197,84.061 53.708,82.55 71.882,82.55 72.517,81.915 U6.10 ; 72.517,75.184 U6.10 ; U6.10 86.347,79.235 ; 131.642,23.438 131.642,38.511 138.597,45.466 ; 138.597,45.466 C1.2 148.717,44.196 U1.1 ; U1.1 150.622,27.94 158.75,19.812 177.955,19.812 178.423,20.281 178.423,21.451 U3.8 178.562,22.86 175.768,25.654 170.053,25.654 168.402,27.305 U3.13 168.402,35.56
JTAG_CLK: P2.4 U4.34 | length 10.8
  Bottom Layer w0.8: P2.4 U4.34
JTAG_TDO: P2.6 U4.36 | length 10.8
  Bottom Layer w0.8: P2.6 U4.36
JTAG_TMS: P2.2 pad.2@27.686,59.436 pad.2@31.877,59.436 U4.37 | length 38.6
  Top Layer w0.8: pad.2@27.686,59.436 pad.2@31.877,59.436
  Bottom Layer w0.8: P2.2 26.149,56.121 27.686,57.658 pad.2@27.686,59.436 ; pad.2@31.877,59.436 31.877,60.833 35.068,64.024 40.751,64.024 41.91,62.865 41.91,49.911 41.402,49.403 U4.37
LATCH_CLOCK: pad.2@83.693,51.943 pad.2@136.398,20.955 pad.2@146.939,39.116 pad.2@170.942,39.116 U3.12 U4.92 U5.12 | length 155.7
  Top Layer w0.8: pad.2@83.693,51.943 93.218,51.943 119.507,25.654 119.507,14.986 124.333,10.16 134.747,10.16 136.398,11.811 pad.2@136.398,20.955 ; pad.2@146.939,39.116 pad.2@170.942,39.116
  Bottom Layer w0.8: U4.92 pad.2@83.693,51.943 ; U5.12 136.398,20.955 143.637,20.955 146.939,24.257 pad.2@146.939,39.116 ; U3.12 pad.2@170.942,39.116
LED_A: R37.2 U4.67 | length 8.9
  Bottom Layer w0.8: U4.67 62.344,23.622 65.519,20.447 R37.2
LED_G: R36.2 U4.65 | length 7.6
  Bottom Layer w0.8: R36.2 U4.65
LED_R: R35.2 U4.63 | length 8.9
  Bottom Layer w0.8: R35.2 54.089,20.447 57.264,23.622 U4.63
MATRIX_DATA: pad.2@78.105,75.692 pad.2@78.105,82.804 R32.2 U4.93 U6.18 | length 66.5
  Top Layer w0.8: pad.2@78.105,75.692 pad.2@78.105,82.804
  Bottom Layer w0.8: U6.18 54.737,89.014 55.753,90.03 R32.2 74.181,90.03 78.105,86.106 pad.2@78.105,82.804 ; U4.93 73.406,51.943 72.009,53.34 72.009,59.055 78.105,65.151 pad.2@78.105,75.692
NetD1_2: D1.2 R21.1 | length 6.8
  Bottom Layer w0.8: R21.1 D1.2
NetD2_2: D2.2 R35.1 | length 2.7
  Bottom Layer w0.8: D2.2 R35.1
NetD3_2: D3.2 R36.1 | length 2.7
  Bottom Layer w0.8: D3.2 R36.1
NetD4_2: D4.2 R37.1 | length 2.7
  Bottom Layer w0.8: D4.2 R37.1
NetDS1_1: DS1.1 DS2.1 DS3.1 DS4.1 pad.2@124.968,82.904 pad.2@135.001,82.904 pad.2@149.733,82.904 pad.2@164.465,82.904 pad.2@179.197,82.904 R8.2 | length 100.5
  Top Layer w0.8: pad.2@124.968,82.904 135.001,82.904 149.733,82.904 164.465,82.904 pad.2@179.197,82.904
  Bottom Layer w0.8: R8.2 111.506,82.904 pad.2@124.968,82.904 ; DS4.1 pad.2@135.001,82.904 ; DS3.1 pad.2@149.733,82.904 ; DS2.1 pad.2@164.465,82.904 ; DS1.1 pad.2@179.197,82.904
NetDS1_2: DS1.2 DS2.2 DS3.2 DS4.2 pad.2@124.968,80.745 pad.2@137.541,80.745 pad.2@152.273,80.745 pad.2@167.005,80.745 pad.2@181.737,80.745 R7.2 | length 85.4
  Top Layer w0.8: pad.2@124.968,80.745 137.541,80.745 152.273,80.745 167.005,80.745 pad.2@181.737,80.745
  Bottom Layer w0.8: R7.2 120.142,73.887 123.063,76.808 123.063,80.276 123.532,80.745 pad.2@124.968,80.745 ; DS4.2 pad.2@137.541,80.745 ; DS3.2 pad.2@152.273,80.745 ; DS2.2 pad.2@167.005,80.745 ; DS1.2 pad.2@181.737,80.745
NetDS1_3: DS1.3 DS1.8 Q3.1 | length 22.4
  Bottom Layer w0.8: Q3.1 DS1.3 DS1.8
NetDS1_4: DS1.4 DS2.4 DS3.4 DS4.4 pad.2@124.968,78.586 pad.2@142.621,78.586 pad.2@157.353,78.586 pad.2@172.085,78.586 pad.2@186.817,78.586 R6.2 | length 77.4
  Top Layer w0.8: pad.2@124.968,78.586 142.621,78.586 157.353,78.586 172.085,78.586 pad.2@186.817,78.586
  Bottom Layer w0.8: R6.2 123.571,74.268 124.968,75.665 pad.2@124.968,78.586 ; DS4.4 pad.2@142.621,78.586 ; DS3.4 pad.2@157.353,78.586 ; DS2.4 pad.2@172.085,78.586 ; DS1.4 pad.2@186.817,78.586
NetDS1_5: DS1.5 DS2.5 DS3.5 DS4.5 pad.2@145.161,72.236 pad.2@159.893,72.236 pad.2@174.625,72.236 pad.2@189.357,72.236 R12.2 | length 78.3
  Top Layer w0.8: pad.2@145.161,72.236 159.893,72.236 174.625,72.236 pad.2@189.357,72.236
  Bottom Layer w0.8: R12.2 145.161,72.236 DS4.5 ; pad.2@159.893,72.236 DS3.5 ; pad.2@174.625,72.236 DS2.5 ; pad.2@189.357,72.236 DS1.5
NetDS1_6: DS1.6 DS2.6 DS3.6 DS4.6 R5.2 | length 85.8
  Bottom Layer w0.8: R5.2 124.587,94.588 144.145,94.588 145.161,93.572 145.161,93.191 ; DS4.6 145.161,93.191 ; DS3.6 159.893,92.937 ; DS2.6 174.625,92.937 ; DS1.6 189.357,92.81 187.706,94.461 176.149,94.461 174.625,92.937 ; 145.161,93.191 146.558,94.588 158.75,94.588 159.893,93.445 159.893,92.937 ; 159.893,92.937 161.417,94.461 173.101,94.461 174.625,92.937
NetDS1_7: DS1.7 DS2.7 DS3.7 DS4.7 pad.2@124.968,89.381 pad.2@142.621,89.381 pad.2@157.353,89.381 pad.2@172.085,89.381 pad.2@186.817,89.381 R4.2 | length 74.7
  Top Layer w0.8: pad.2@124.968,89.381 142.621,89.381 157.353,89.381 172.085,89.381 pad.2@186.817,89.381
  Bottom Layer w0.8: R4.2 122.809,89.381 pad.2@124.968,89.381 ; pad.2@142.621,89.381 DS4.7 ; pad.2@157.353,89.381 DS3.7 ; pad.2@172.085,89.381 DS2.7 ; pad.2@186.817,89.381 DS1.7
NetDS1_9: DS1.9 DS2.9 DS3.9 DS4.9 pad.2@124.968,87.222 pad.2@137.541,87.222 pad.2@152.273,87.222 pad.2@167.005,87.222 pad.2@181.737,87.222 R9.2 | length 86
  Top Layer w0.8: pad.2@124.968,87.222 137.541,87.222 152.273,87.222 167.005,87.222 pad.2@181.737,87.222
  Bottom Layer w0.8: R9.2 116.078,85.571 122.174,85.571 123.698,87.095 124.841,87.095 pad.2@124.968,87.222 ; pad.2@137.541,87.222 DS4.9 ; pad.2@152.273,87.222 DS3.9 ; pad.2@167.005,87.222 DS2.9 ; pad.2@181.737,87.222 DS1.9
NetDS1_10: DS1.10 DS2.10 DS3.10 DS4.10 pad.2@124.968,85.063 pad.2@135.001,85.063 pad.2@149.733,85.063 pad.2@164.465,85.063 pad.2@179.197,85.063 R11.2 | length 96
  Top Layer w0.8: pad.2@124.968,85.063 135.001,85.063 149.733,85.063 164.465,85.063 pad.2@179.197,85.063
  Bottom Layer w0.8: R11.2 113.792,84.174 122.809,84.174 123.698,85.063 pad.2@124.968,85.063 ; pad.2@135.001,85.063 DS4.10 ; pad.2@149.733,85.063 DS3.10 ; pad.2@164.465,85.063 DS2.10 ; pad.2@179.197,85.063 DS1.10
NetDS2_3: DS2.3 DS2.8 Q4.1 | length 22.3
  Bottom Layer w0.8: Q4.1 DS2.3 DS2.8
NetDS3_3: DS3.3 DS3.8 Q7.1 | length 22.3
  Bottom Layer w0.8: Q7.1 DS3.3 DS3.8
NetDS4_3: DS4.3 DS4.8 Q10.1 | length 48.9
  Bottom Layer w0.8: Q10.1 127.448,69.121 125.73,70.839 125.73,72.998 126.746,74.014 139.319,74.014 140.081,74.776 DS4.3 DS4.8
NetJ2_2: J2.2 P2.1 | length 7.1
  Bottom Layer w0.8: P2.1 23.609,56.883 25.019,58.293 J2.2
NetJ3_2: J3.2 R33.1 | length 19.7
  Bottom Layer w0.8: R33.1 40.513,77.457 40.513,89.522 42.799,91.808 J3.2
NetQ1_2: Q1.2 R1.2 | length 15.9
  Bottom Layer w0.8: R1.2 87.528,86.081 88.951,87.503 98.718,87.503 99.187,87.034 Q1.2
NetQ2_2: Q2.2 R2.2 | length 14.8
  Bottom Layer w0.8: R2.2 91.44,79.121 92.329,78.232 98.425,78.232 99.187,78.994 Q2.2
NetQ3_2: Q3.2 R3.2 | length 8.2
  Bottom Layer w0.8: R3.2 178.838,70.182 178.838,68.217 180.628,66.427 184.243,66.427 Q3.2
NetQ4_2: Q4.2 R10.2 | length 8.1
  Bottom Layer w0.8: R10.2 164.973,67.283 165.735,66.521 Q4.2
NetQ5_2: Q5.2 R13.2 | length 3.4
  Bottom Layer w0.8: R13.2 Q5.2
NetQ6_2: Q6.2 R14.2 | length 3.4
  Bottom Layer w0.8: R14.2 Q6.2
NetQ7_2: Q7.2 R15.2 | length 8.7
  Bottom Layer w0.8: R15.2 149.098,67.918 150.495,66.521 Q7.2
NetQ8_2: Q8.2 R16.2 | length 5.7
  Bottom Layer w0.8: R16.2 98.82,69.836 104.507,69.836 Q8.2
NetQ9_2: Q9.2 R17.2 | length 9.2
  Bottom Layer w0.8: Q9.2 116.244,69.823 116.713,69.354 R17.2
NetQ10_2: Q10.2 R18.2 | length 3.8
  Bottom Layer w0.8: R18.2 Q10.2
NetQ11_2: Q11.2 R19.2 | length 51.7
  Bottom Layer w0.8: R19.2 104.04,65.405 109.474,65.405 115.062,59.817 117.475,59.817 118.364,60.706 118.364,72.898 115.824,75.438 115.824,78.105 114.808,79.121 113.03,79.121 112.268,78.359 112.268,71.12 110.998,69.85 109.628,69.85 Q11.2
NetQ12_2: Q12.2 R20.2 | length 3.4
  Bottom Layer w0.8: R20.2 Q12.2
NetR22_1: R22.1 U4.38 | length 7.2
  Bottom Layer w0.8: R22.1 U4.38
NetR33_2: R33.2 U6.2 | length 3.3
  Bottom Layer w0.8: R33.2 U6.2
NetU3_14: pad.2@165.862,32.893 pad.2@184.277,32.893 U3.14 U5.9 | length 89.4
  Top Layer w0.8: pad.2@165.862,32.893 pad.2@184.277,32.893
  Bottom Layer w0.8: U5.9 179.324,13.335 184.277,18.288 pad.2@184.277,32.893 ; U3.14 pad.2@165.862,32.893
RESET: C6.1 P2.10 R29.1 SW1.2 U4.52 | length 48.6
  Bottom Layer w0.8: 19.2,26.595 19.2,28.217 ; P2.10 26.149,41.77 20.447,36.068 R29.1 18.161,36.055 18.161,34.925 16.891,33.655 16.891,30.526 19.2,28.217 ; U4.52 39.624,29.083 37.846,27.305 C6.1 25.908,27.305 24.003,29.21 20.193,29.21 19.2,28.217
SEL0: U1.2 U3.1 | length 25.8
  Bottom Layer w0.8: U1.2 153.162,32.385 160.782,24.765 U3.1
SEL1: U1.3 U3.15 | length 19
  Bottom Layer w0.8: U1.3 155.702,42.291 158.907,39.086 160.431,39.086 163.322,36.195 U3.15
SERIAL_CLOCK: pad.2@70.104,17.526 pad.2@141.351,18.415 U3.11 U4.71 U5.11 | length 168
  Top Layer w0.8: pad.2@70.104,17.526 70.104,11.684 78.994,2.794 138.684,2.794 141.351,5.461 pad.2@141.351,18.415
  Bottom Layer w0.8: U4.71 67.424,21.73 70.104,19.05 pad.2@70.104,17.526 ; U5.11 141.351,18.415 179.832,18.415 181.102,19.685 181.102,24.13 178.308,26.924 174.244,26.924 173.482,27.686 U3.11
SERIAL_DATA: pad.2@83.693,49.403 pad.2@138.557,26.035 U4.90 U5.14 | length 105.8
  Top Layer w0.8: pad.2@83.693,49.403 92.075,49.403 116.84,24.638 116.84,14.351 123.698,7.493 135.128,7.493 138.557,10.922 pad.2@138.557,26.035
  Bottom Layer w0.8: U4.90 pad.2@83.693,49.403 ; U5.14 pad.2@138.557,26.035
pads on no net: P2.7 P2.8 SW1.1 SW1.3 U1.9 U1.10 U1.11 U1.12 U3.2 U3.3 U3.4 U3.5 U3.6 U3.7 U3.9 U4.1 U4.2 U4.3 U4.4 U4.5 U4.6 U4.7 U4.10 U4.11 U4.12 U4.26 U4.27 U4.28 U4.29 U4.31 U4.32 U4.33 U4.35 U4.39 U4.42 U4.43 U4.44 U4.45 U4.46 U4.47 U4.50 U4.51 U4.54 U4.56 U4.58 U4.59 U4.62 U4.64 U4.66 U4.68 U4.69 U4.70 U4.72 U4.78 U4.79 U4.80 U4.81 U4.82 U4.83 U4.84 U4.85 U4.86 U4.87 U4.91 U4.94 U4.95 U4.96 U4.97 U4.98 U4.99 U4.100 U6.3 U6.4 U6.5 U6.6 U6.7 U6.8 U6.9 U6.11 U6.12 U6.13 U6.14 U6.15 U6.16 U6.17

## Keep-outs
Keep-Out Layer:
  the board outline again, w1

## Other copper
Top Layer:
  text "TP FINAL EMBEBIDOS 2026" at 148.228,6.115 h2
Bottom Layer:
  text "TP FINAL EMBEBIDOS 2026" at 192.894,6.115 h2

## Text inside footprints (layer, text, board x,y; h text height)
C2: Top Overlay "+" at 15.573,54.762 h1.02
P2: Top Overlay "10" at 25.641,42.799 h1.27 r270; Top Overlay "9" at 23.101,42.799 h1.27 r270; Top Overlay "1" at 23.101,56.515 h1.27 r270; Top Overlay "2" at 25.641,57.023 h1.27 r270